# EAGLE board PFOP_panelized (EAGLE 9.1.3)
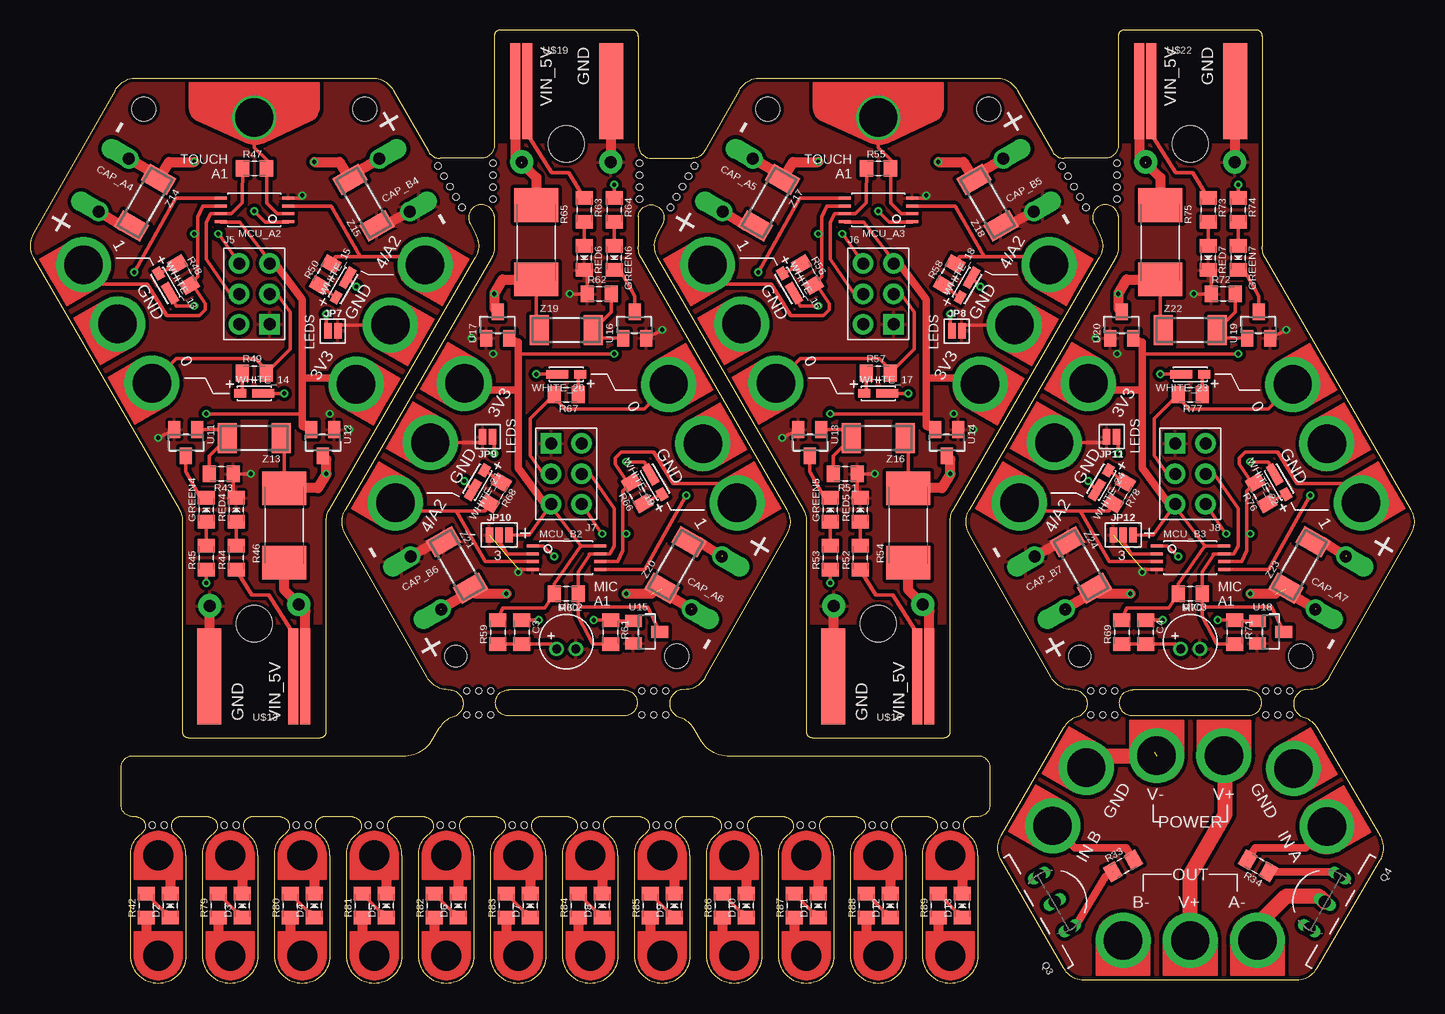
[diagram p0: board, top side]
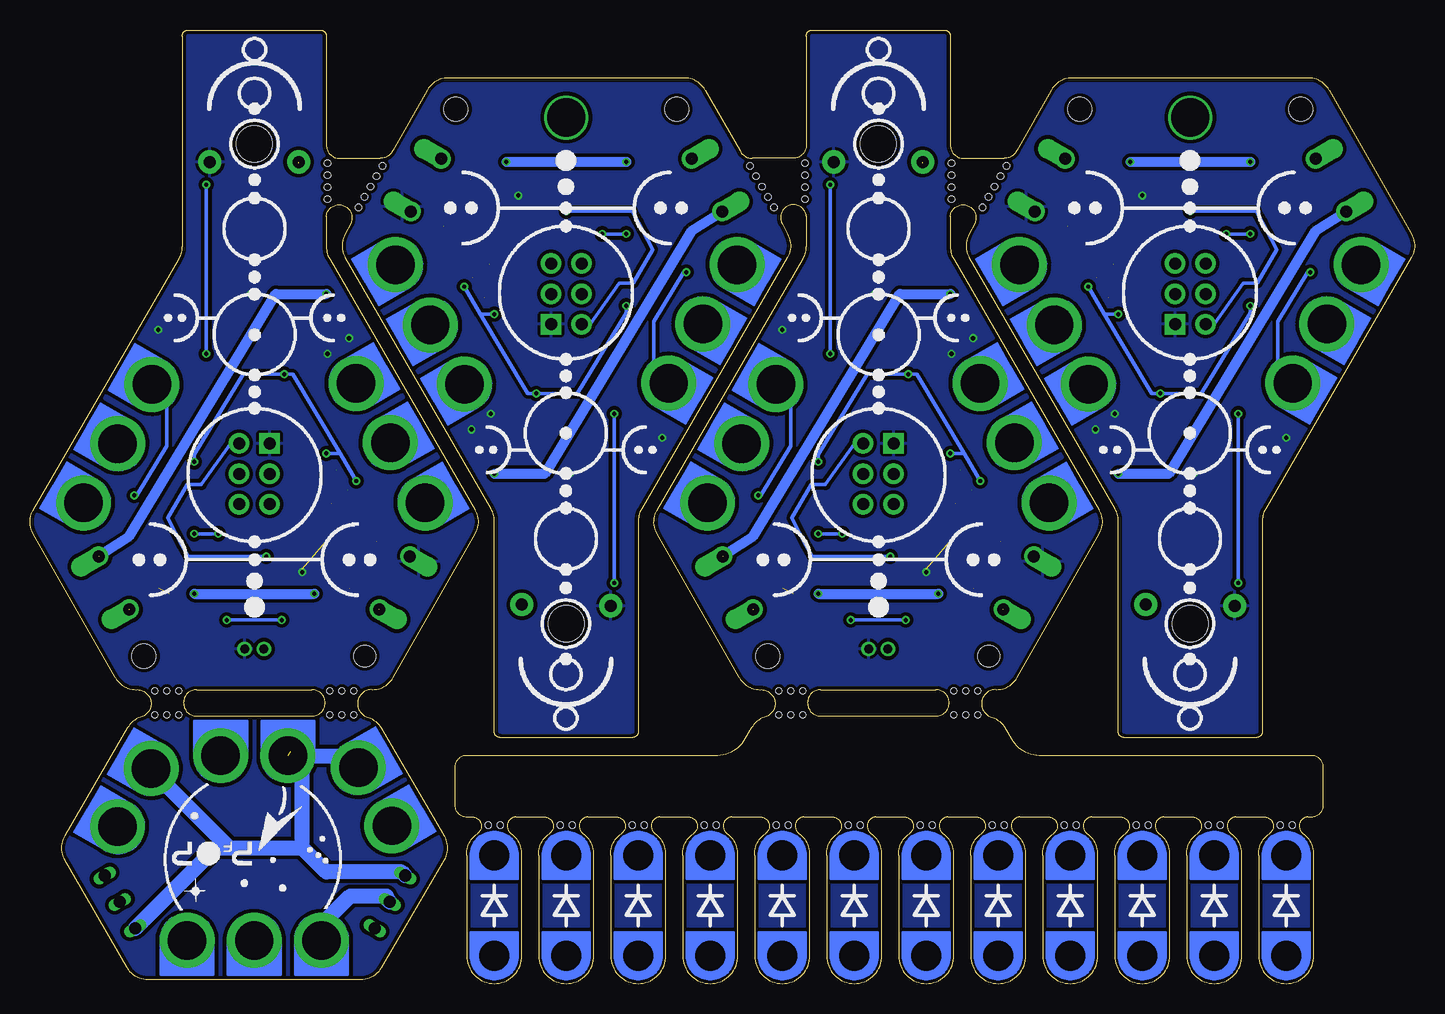
[diagram p1: board, bottom side, seen from below]

Size 115.38 x 79.5 mm. Coordinates in mm from the lower left corner, seen from the top.
Outline: 56.27,25.51 63.12,37.5 arc60 63.11,39.5 50.96,60.43 arc-30 50.69,61.44 50.69,64 arc-200 52.71,63.36 52.26,62.5 arc60 52.27,60.5 64.42,39.57 arc-30 64.69,38.56 64.69,21 arc90 65.19,20.5 76.19,20.5 arc90 76.69,21 76.69,38.56 arc-30 76.96,39.57 89.11,60.5 arc60 89.12,62.5 88.67,63.36 arc-200 90.69,64 90.69,61.44 arc-30 90.42,60.43 78.27,39.5 arc60 78.26,37.5 85.11,25.51 arc60 86.85,24.5 arc-170 87.19,22.2 arc40 86.11,21.31 80.88,12.31 arc60 80.88,10.29 86.11,1.29 arc60 87.84,0.3 105.54,0.3 arc60 107.27,1.29 112.51,10.29 arc60 112.51,12.31 107.27,21.31 arc40 106.19,22.2 arc-170 106.53,24.5 arc60 108.27,25.51 115.12,37.5 arc60 115.11,39.5 102.96,60.43 arc-30 102.69,61.44 102.69,79 arc90 102.19,79.5 91.19,79.5 arc90 90.69,79 90.69,69.9 arc-90 89.59,68.8 86.19,68.8 arc-65 85.17,69.42 82.27,74.49 arc60 80.53,75.5 60.85,75.5 arc60 59.11,74.49 56.21,69.42 arc-65 55.19,68.8 51.79,68.8 arc-90 50.69,69.9 50.69,79 arc90 50.19,79.5 39.19,79.5 arc90 38.69,79 38.69,69.9 arc-90 37.59,68.8 34.19,68.8 arc-65 33.17,69.42 30.27,74.49 arc60 28.53,75.5 8.85,75.5 arc60 7.11,74.49 0.26,62.5 arc60 0.27,60.5 12.42,39.57 arc-30 12.69,38.56 12.69,21 arc90 13.19,20.5 24.19,20.5 arc90 24.69,21 24.69,38.56 arc-30 24.96,39.57 37.11,60.5 arc60 37.12,62.5 36.67,63.36 arc-200 38.69,64 38.69,61.44 arc-30 38.42,60.43 26.27,39.5 arc60 26.26,37.5 33.11,25.51 arc60 34.85,24.5 arc-170 35.19,22.2 arc40 34.11,21.31 33.42,20.19 arc-58 31.29,19 8.59,19 arc90 7.59,18 7.59,14.9 arc90 8.59,13.9 8.89,13.9 arc-140 9.29,12.5 arc60 8.39,10.7 8.39,2.3 arc90 10.69,0 arc90 12.99,2.3 12.99,10.7 arc60 12.09,12.5 arc-140 12.49,13.9 14.89,13.9 arc-140 15.29,12.5 arc60 14.39,10.7 14.39,2.3 arc90 16.69,0 arc90 18.99,2.3 18.99,10.7 arc60 18.09,12.5 arc-140 18.49,13.9 20.89,13.9 arc-140 21.29,12.5 arc60 20.39,10.7 20.39,2.3 arc90 22.69,0 arc90 24.99,2.3 24.99,10.7 arc60 24.09,12.5 arc-140 24.49,13.9 26.89,13.9 arc-140 27.29,12.5 arc60 26.39,10.7 26.39,2.3 arc90 28.69,0 arc90 30.99,2.3 30.99,10.7 arc60 30.09,12.5 arc-140 30.49,13.9 32.89,13.9 arc-140 33.29,12.5 arc60 32.39,10.7 32.39,2.3 arc90 34.69,0 arc90 36.99,2.3 36.99,10.7 arc60 36.09,12.5 arc-140 36.49,13.9 38.89,13.9 arc-140 39.29,12.5 arc60 38.39,10.7 38.39,2.3 arc90 40.69,0 arc90 42.99,2.3 42.99,10.7 arc60 42.09,12.5 arc-140 42.49,13.9 44.89,13.9 arc-140 45.29,12.5 arc60 44.39,10.7 44.39,2.3 arc90 46.69,0 arc90 48.99,2.3 48.99,10.7 arc60 48.09,12.5 arc-140 48.49,13.9 50.89,13.9 arc-140 51.29,12.5 arc60 50.39,10.7 50.39,2.3 arc90 52.69,0 arc90 54.99,2.3 54.99,10.7 arc60 54.09,12.5 arc-140 54.49,13.9 56.89,13.9 arc-140 57.29,12.5 arc60 56.39,10.7 56.39,2.3 arc90 58.69,0 arc90 60.99,2.3 60.99,10.7 arc60 60.09,12.5 arc-140 60.49,13.9 62.89,13.9 arc-140 63.29,12.5 arc60 62.39,10.7 62.39,2.3 arc90 64.69,0 arc90 66.99,2.3 66.99,10.7 arc60 66.09,12.5 arc-140 66.49,13.9 68.89,13.9 arc-140 69.29,12.5 arc60 68.39,10.7 68.39,2.3 arc90 70.69,0 arc90 72.99,2.3 72.99,10.7 arc60 72.09,12.5 arc-140 72.49,13.9 74.89,13.9 arc-140 75.29,12.5 arc60 74.39,10.7 74.39,2.3 arc90 76.69,0 arc90 78.99,2.3 78.99,10.7 arc60 78.09,12.5 arc-140 78.49,13.9 78.99,13.9 arc90 79.99,14.9 79.99,18 arc90 78.99,19 58.09,19 arc-58 55.96,20.19 55.27,21.31 arc40 54.19,22.2 arc-170 54.53,24.5 arc60 56.27,25.51
Outline: 91.89,22.3 arc-180 91.89,24.5 101.49,24.5 arc-180 101.49,22.3 91.89,22.3
Outline: 39.89,22.3 arc-180 39.89,24.5 49.49,24.5 arc-180 49.49,22.3 39.89,22.3
Copper layers (1*16): Top 0.035mm / dielectric 1.6mm / Bottom 0.035mm
Design rules "Elecrow_2-layer_PCB_eagle_rule *": minimum track width 6mil, minimum drill 12mil, track to track 6mil, track to pad 6mil, pad to pad 6mil, via to via 8mil, smd to smd 0mil, copper to edge 0.3mm, drill to drill 10mil, minimum pad ring 0mil, minimum via ring 6mil, stop-mask expansion 0mil, vias tented up to drill 100mil, thermal gap 10mil
Holes 0.5 mm at 34.01,68.17 34.51,67.31 35.01,66.44 35.51,65.58 36.01,64.71 38.59,65.4 38.59,66.4 38.59,67.4 38.59,68.4 55.37,68.17 54.87,67.31 54.37,66.44 53.87,65.58 53.37,64.71 50.79,65.4 50.79,66.4 50.79,67.4 50.79,68.4 86.01,68.17 86.51,67.31 87.01,66.44 87.51,65.58 88.01,64.71 90.59,65.4 90.59,66.4 90.59,67.4 90.59,68.4 90.39,22.4 89.39,22.4 88.39,22.4 90.39,24.4 89.39,24.4 88.39,24.4 104.99,22.4 103.99,22.4 102.99,22.4 104.99,24.4 103.99,24.4 102.99,24.4 76.19,13.2 77.19,13.2 70.19,13.2 71.19,13.2 64.19,13.2 65.19,13.2 58.19,13.2 59.19,13.2 52.19,13.2 53.19,13.2 46.19,13.2 47.19,13.2 40.19,13.2 41.19,13.2 34.19,13.2 35.19,13.2 28.19,13.2 29.19,13.2 22.19,13.2 23.19,13.2 16.19,13.2 17.19,13.2 10.19,13.2 11.19,13.2 38.39,22.4 37.39,22.4 36.39,22.4 38.39,24.4 37.39,24.4 36.39,24.4 52.99,22.4 51.99,22.4 50.99,22.4 52.99,24.4 51.99,24.4 50.99,24.4
Holes 3 mm at 18.69,30 70.69,30 44.69,70 96.69,70
Holes 2 mm at 9.49,72.9 27.89,72.9 61.49,72.9 79.89,72.9 53.89,27.3 105.89,27.3
Holes 1.8 mm at 35.49,27.3 87.49,27.3

## Footprints (pad centres in the part's own frame; a part is rotated, then mirrored left to right if it is on the bottom)
0805 = smd 1.1 x 1.4: 1 -1,0; 2 1,0
SUPERCAP_2.7V-4.7F = drill 1 pad 1.676 offset: + 2.54,3.81; - -2.54,3.81
0805_LED = smd 1.1 x 1.4: + -1,0; - 1,0
ISP_HEADER = drill 1 pad 1.676 square: GND 1.27,-2.54 | drill 1 pad 1.676: MISO -1.27,2.54; MOSI 1.27,0; RESET -1.27,-2.54; SCK -1.27,0; VCC 1.27,2.54
SMT-JUMPER_2_NO_NO-SILK = smd 0.635 x 1.27: 1 -0.406,0; 2 0.406,0
SMT-JUMPER_3_NO_NO-SILK = smd 0.635 x 1.27: 1 -0.813,0; 2 0,0; 3 0.813,0
TSSOP-8 = smd 1 x 0.25: 1 -2.813,0.975; 2 -2.813,0.325; 3 -2.813,-0.325; 4 -2.813,-0.975; 5 2.813,-0.975; 6 2.813,-0.325; 7 2.813,0.325; 8 2.813,0.975
ELECTRET_4.5MM = drill 0.75 pad 1.2: + 0.8,0.6; - -0.8,0.6
POWER_TRANSISTOR = drill 1.016 long: B -2.54,0; C 0,0; E 2.54,0
2512 = smd 2.8 x 3.7: 1 -3.1,0; 2 3.1,0
BIGTAP = drill 3.2 pad 4.572: P$1 0,0
SEQUIN_TERMINAL = drill 2.5: P$1 0,0
BIGTAP_TOUCH = drill 3.2 pad 3.683: P$1 0,0
SOT23 = smd 1.4 x 1: 1 -1.1,0.95; 2 -1.1,-0.95; 3 1.1,0
USB_CONN_POWER = smd 0.8 x 8: 5V_A -4.25,-0.1; 5V_B -3.25,-0.1 | smd 2 x 8: GND 3.75,-0.1
1PIN = drill 1 pad 1.93: P$1 0,0
PLCC-2_LED = smd 1 x 0.7: + -1.15,0 | smd 1.8 x 0.7: - 0.75,0
MINIMELF = smd 1.6 x 2.5: 1 -2.25,0; 2 2.25,0

## Placement (x,y rotation side)
C3  0.1uF  [0805]  40.99,29.3 270 top
C4  0.1uF  [0805]  92.99,29.3 270 top
CAP_A4  4.7F  [SUPERCAP_2.7V-4.7F]  3.68,68.46 240 top
CAP_A5  4.7F  [SUPERCAP_2.7V-4.7F]  55.68,68.46 240 top
CAP_A6  4.7F  [SUPERCAP_2.7V-4.7F]  59.69,31.5 60 top
CAP_A7  4.7F  [SUPERCAP_2.7V-4.7F]  111.69,31.5 60 top
CAP_B4  4.7F  [SUPERCAP_2.7V-4.7F]  33.68,68.46 120 top
CAP_B5  4.7F  [SUPERCAP_2.7V-4.7F]  85.68,68.46 120 top
CAP_B6  4.7F  [SUPERCAP_2.7V-4.7F]  29.69,31.5 300 top
CAP_B7  4.7F  [SUPERCAP_2.7V-4.7F]  81.69,31.5 300 top
D2  LED0805  [0805_LED]  11.69,6.5 90 top
D3  LED0805  [0805_LED]  17.69,6.5 90 top
D4  LED0805  [0805_LED]  23.69,6.5 90 top
D5  LED0805  [0805_LED]  29.69,6.5 90 top
D6  LED0805  [0805_LED]  35.69,6.5 90 top
D7  LED0805  [0805_LED]  41.69,6.5 90 top
D8  LED0805  [0805_LED]  47.69,6.5 90 top
D9  LED0805  [0805_LED]  53.69,6.5 90 top
D10  LED0805  [0805_LED]  59.69,6.5 90 top
D11  LED0805  [0805_LED]  65.69,6.5 90 top
D12  LED0805  [0805_LED]  71.69,6.5 90 top
D13  LED0805  [0805_LED]  77.69,6.5 90 top
GREEN4  LED  [0805_LED]  14.69,39.5 90 top
GREEN5  LED  [0805_LED]  66.69,39.5 90 top
GREEN6  LED  [0805_LED]  48.69,60.5 270 top
GREEN7  LED  [0805_LED]  100.69,60.5 270 top
J5  ISP_HEADER  [ISP_HEADER]  18.69,57.5 0 top
J6  ISP_HEADER  [ISP_HEADER]  70.69,57.5 0 top
J7  ISP_HEADER  [ISP_HEADER]  44.69,42.5 180 top
J8  ISP_HEADER  [ISP_HEADER]  96.69,42.5 180 top
JP7  JUMPER  [SMT-JUMPER_2_NO_NO-SILK]  25.25,54.42 0 top
JP8  JUMPER  [SMT-JUMPER_2_NO_NO-SILK]  77.25,54.42 0 top
JP9  JUMPER  [SMT-JUMPER_2_NO_NO-SILK]  38.13,45.58 180 top
JP10  JUMPER  [SMT-JUMPER_3_NO_NO-SILK]  39.09,37.4 0 top
JP11  JUMPER  [SMT-JUMPER_2_NO_NO-SILK]  90.13,45.58 180 top
JP12  JUMPER  [SMT-JUMPER_3_NO_NO-SILK]  91.09,37.4 0 top
MCU_A2  ATTINY45  [TSSOP-8]  18.69,64.5 180 top
MCU_A3  ATTINY45  [TSSOP-8]  70.69,64.5 180 top
MCU_B2  ATTINY45  [TSSOP-8]  44.69,35.5 0 top
MCU_B3  ATTINY45  [TSSOP-8]  96.69,35.5 0 top
MIC2  ELECTRET  [ELECTRET_4.5MM]  44.69,28.5 180 top
MIC3  ELECTRET  [ELECTRET_4.5MM]  96.69,28.5 180 top
Q3  [POWER_TRANSISTOR]  85.39,6.8 120 top
Q4  [POWER_TRANSISTOR]  107.89,6.8 240 top
R33  2.2k  [0805]  91.09,9.8 30 top
R34  2.2k  [0805]  102.34,9.81 150 top
R42  [0805]  9.69,6.5 90 top
R43  10k  [0805]  15.94,42.5 180 top
R44  100R  [0805]  17.19,35.5 90 top
R45  100R  [0805]  14.69,35.5 90 top
R46  5.6R  [2512]  21.19,38.2 90 top
R47  2.2M  [0805]  18.71,67.96 0 top
R48  100R  [0805]  12.79,59.1 300 top
R49  100R  [0805]  18.69,50.9 0 top
R50  100R  [0805]  24.59,59.1 60 top
R51  10k  [0805]  67.94,42.5 180 top
R52  100R  [0805]  69.19,35.5 90 top
R53  100R  [0805]  66.69,35.5 90 top
R54  5.6R  [2512]  73.19,38.2 90 top
R55  2.2M  [0805]  70.71,67.96 0 top
R56  100R  [0805]  64.79,59.1 300 top
R57  100R  [0805]  70.69,50.9 0 top
R58  100R  [0805]  76.59,59.1 60 top
R59  10k  [0805]  38.99,29.3 90 top
R60  10k  [0805]  44.69,32.5 180 top
R61  100k  [0805]  48.39,29.3 270 top
R62  10k  [0805]  47.44,57.5 0 top
R63  100R  [0805]  46.19,64.5 270 top
R64  100R  [0805]  48.69,64.5 270 top
R65  5.6R  [2512]  42.19,61.8 270 top
R66  100R  [0805]  50.59,40.9 120 top
R67  100R  [0805]  44.69,49.1 180 top
R68  100R  [0805]  38.79,40.9 240 top
R69  10k  [0805]  90.99,29.3 90 top
R70  10k  [0805]  96.69,32.5 180 top
R71  100k  [0805]  100.39,29.3 270 top
R72  10k  [0805]  99.44,57.5 0 top
R73  100R  [0805]  98.19,64.5 270 top
R74  100R  [0805]  100.69,64.5 270 top
R75  5.6R  [2512]  94.19,61.8 270 top
R76  100R  [0805]  102.59,40.9 120 top
R77  100R  [0805]  96.69,49.1 180 top
R78  100R  [0805]  90.79,40.9 240 top
R79  [0805]  15.69,6.5 90 top
R80  [0805]  21.69,6.5 90 top
R81  [0805]  27.69,6.5 90 top
R82  [0805]  33.69,6.5 90 top
R83  [0805]  39.69,6.5 90 top
R84  [0805]  45.69,6.5 90 top
R85  [0805]  51.69,6.5 90 top
R86  [0805]  57.69,6.5 90 top
R87  [0805]  63.69,6.5 90 top
R88  [0805]  69.69,6.5 90 top
R89  [0805]  75.69,6.5 90 top
RED4  LED  [0805_LED]  17.19,39.5 90 top
RED5  LED  [0805_LED]  69.19,39.5 90 top
RED6  LED  [0805_LED]  46.19,60.5 270 top
RED7  LED  [0805_LED]  98.19,60.5 270 top
TP32  SEWTAPBIG  [BIGTAP]  102.29,3.6 180 top
TP33  SEWTAPBIG  [BIGTAP]  91.09,3.6 180 top
TP34  SEWTAPBIG  [BIGTAP]  85.22,13.15 60 top
TP35  SEWTAPBIG  [BIGTAP]  108.09,13.08 300 top
TP36  SEWTAPBIG  [BIGTAP]  96.69,3.6 180 top
TP37  SEWTAPBIG  [BIGTAP]  99.49,19 0 top
TP38  SEWTAPBIG  [BIGTAP]  88.02,18 60 top
TP39  SEWTAPBIG  [BIGTAP]  105.29,17.93 300 top
TP40  SEWTAPBIG  [BIGTAP]  93.89,19 0 top
TP47  SEWTAPSEQUIN  [SEQUIN_TERMINAL]  10.69,10.7 270 top
TP48  SEWTAPSEQUIN  [SEQUIN_TERMINAL]  10.69,2.3 90 top
TP49  SEWTAPBIG  [BIGTAP]  4.45,59.93 120 top
TP50  SEWTAPBIG  [BIGTAP]  10.15,50.06 120 top
TP51  SEWTAPBIG  [BIGTAP]  32.93,59.93 240 top
TP52  SEWTAPBIG  [BIGTAP]  30.03,54.91 240 top
TP53  SEWTAPBIG  [BIGTAP]  7.3,54.99 120 top
TP54  SEWTAPBIG  [BIGTAP]  27.18,49.97 240 top
TP55  SEWTAP  [BIGTAP_TOUCH]  18.69,72.2 0 top
TP56  SEWTAPBIG  [BIGTAP]  56.45,59.93 120 top
TP57  SEWTAPBIG  [BIGTAP]  62.15,50.06 120 top
TP58  SEWTAPBIG  [BIGTAP]  84.93,59.93 240 top
TP59  SEWTAPBIG  [BIGTAP]  82.03,54.91 240 top
TP60  SEWTAPBIG  [BIGTAP]  59.3,54.99 120 top
TP61  SEWTAPBIG  [BIGTAP]  79.18,49.97 240 top
TP62  SEWTAP  [BIGTAP_TOUCH]  70.69,72.2 0 top
TP63  SEWTAPBIG  [BIGTAP]  58.93,40.07 300 top
TP64  SEWTAPBIG  [BIGTAP]  53.23,49.94 300 top
TP65  SEWTAPBIG  [BIGTAP]  30.45,40.07 60 top
TP66  SEWTAPBIG  [BIGTAP]  33.35,45.09 60 top
TP67  SEWTAPBIG  [BIGTAP]  56.08,45.01 300 top
TP68  SEWTAPBIG  [BIGTAP]  36.2,50.03 60 top
TP69  SEWTAPBIG  [BIGTAP]  110.93,40.07 300 top
TP70  SEWTAPBIG  [BIGTAP]  105.23,49.94 300 top
TP71  SEWTAPBIG  [BIGTAP]  82.45,40.07 60 top
TP72  SEWTAPBIG  [BIGTAP]  85.35,45.09 60 top
TP73  SEWTAPBIG  [BIGTAP]  108.08,45.01 300 top
TP74  SEWTAPBIG  [BIGTAP]  88.2,50.03 60 top
TP75  SEWTAPSEQUIN  [SEQUIN_TERMINAL]  16.69,10.7 270 top
TP76  SEWTAPSEQUIN  [SEQUIN_TERMINAL]  16.69,2.3 90 top
TP77  SEWTAPSEQUIN  [SEQUIN_TERMINAL]  22.69,10.7 270 top
TP78  SEWTAPSEQUIN  [SEQUIN_TERMINAL]  22.69,2.3 90 top
TP79  SEWTAPSEQUIN  [SEQUIN_TERMINAL]  28.69,10.7 270 top
TP80  SEWTAPSEQUIN  [SEQUIN_TERMINAL]  28.69,2.3 90 top
TP81  SEWTAPSEQUIN  [SEQUIN_TERMINAL]  34.69,10.7 270 top
TP82  SEWTAPSEQUIN  [SEQUIN_TERMINAL]  34.69,2.3 90 top
TP83  SEWTAPSEQUIN  [SEQUIN_TERMINAL]  40.69,10.7 270 top
TP84  SEWTAPSEQUIN  [SEQUIN_TERMINAL]  40.69,2.3 90 top
TP85  SEWTAPSEQUIN  [SEQUIN_TERMINAL]  46.69,10.7 270 top
TP86  SEWTAPSEQUIN  [SEQUIN_TERMINAL]  46.69,2.3 90 top
TP87  SEWTAPSEQUIN  [SEQUIN_TERMINAL]  52.69,10.7 270 top
TP88  SEWTAPSEQUIN  [SEQUIN_TERMINAL]  52.69,2.3 90 top
TP89  SEWTAPSEQUIN  [SEQUIN_TERMINAL]  58.69,10.7 270 top
TP90  SEWTAPSEQUIN  [SEQUIN_TERMINAL]  58.69,2.3 90 top
TP91  SEWTAPSEQUIN  [SEQUIN_TERMINAL]  64.69,10.7 270 top
TP92  SEWTAPSEQUIN  [SEQUIN_TERMINAL]  64.69,2.3 90 top
TP93  SEWTAPSEQUIN  [SEQUIN_TERMINAL]  70.69,10.7 270 top
TP94  SEWTAPSEQUIN  [SEQUIN_TERMINAL]  70.69,2.3 90 top
TP95  SEWTAPSEQUIN  [SEQUIN_TERMINAL]  76.69,10.7 270 top
TP96  SEWTAPSEQUIN  [SEQUIN_TERMINAL]  76.69,2.3 90 top
U11  2N7002  [SOT23]  12.99,45.1 270 top
U12  3.3V  [SOT23]  24.39,45.1 270 top
U13  2N7002  [SOT23]  64.99,45.1 270 top
U14  3.3V  [SOT23]  76.39,45.1 270 top
U15  BC847  [SOT23]  51.39,29.3 0 top
U16  2N7002  [SOT23]  50.39,54.9 90 top
U17  3.3V  [SOT23]  38.99,54.9 90 top
U18  BC847  [SOT23]  103.39,29.3 0 top
U19  2N7002  [SOT23]  102.39,54.9 90 top
U20  3.3V  [SOT23]  90.99,54.9 90 top
U$13  USB_CONN_POWER  [USB_CONN_POWER]  18.69,25.5 180 top
U$14  1PIN  [1PIN]  22.39,31.6 0 top
U$15  1PIN  [1PIN]  14.99,31.5 0 top
U$16  USB_CONN_POWER  [USB_CONN_POWER]  70.69,25.5 180 top
U$17  1PIN  [1PIN]  74.39,31.6 0 top
U$18  1PIN  [1PIN]  66.99,31.5 0 top
U$19  USB_CONN_POWER  [USB_CONN_POWER]  44.69,74.5 0 top
U$20  1PIN  [1PIN]  40.99,68.5 180 top
U$21  1PIN  [1PIN]  48.39,68.5 180 top
U$22  USB_CONN_POWER  [USB_CONN_POWER]  96.69,74.5 0 top
U$23  1PIN  [1PIN]  92.99,68.5 180 top
U$24  1PIN  [1PIN]  100.39,68.5 180 top
WHITE_13  LED  [PLCC-2_LED]  11.29,58.2 300 top
WHITE_14  LED  [PLCC-2_LED]  18.69,49.2 0 top
WHITE_15  LED  [PLCC-2_LED]  26.09,58.2 60 top
WHITE_16  LED  [PLCC-2_LED]  63.29,58.2 300 top
WHITE_17  LED  [PLCC-2_LED]  70.69,49.2 0 top
WHITE_18  LED  [PLCC-2_LED]  78.09,58.2 60 top
WHITE_19  LED  [PLCC-2_LED]  52.09,41.8 120 top
WHITE_20  LED  [PLCC-2_LED]  44.69,50.8 180 top
WHITE_21  LED  [PLCC-2_LED]  37.29,41.8 240 top
WHITE_22  LED  [PLCC-2_LED]  104.09,41.8 120 top
WHITE_23  LED  [PLCC-2_LED]  96.69,50.8 180 top
WHITE_24  LED  [PLCC-2_LED]  89.29,41.8 240 top
Z13  5.1V  [MINIMELF]  18.69,45.5 180 top
Z14  2.7V  [MINIMELF]  9.59,65.1 240 top
Z15  2.7V  [MINIMELF]  27.79,65.1 120 top
Z16  5.1V  [MINIMELF]  70.69,45.5 180 top
Z17  2.7V  [MINIMELF]  61.59,65.1 240 top
Z18  2.7V  [MINIMELF]  79.79,65.1 120 top
Z19  5.1V  [MINIMELF]  44.69,54.5 0 top
Z20  2.7V  [MINIMELF]  53.79,34.9 60 top
Z21  2.7V  [MINIMELF]  35.59,34.9 300 top
Z22  5.1V  [MINIMELF]  96.69,54.5 0 top
Z23  2.7V  [MINIMELF]  105.79,34.9 60 top
Z24  2.7V  [MINIMELF]  87.59,34.9 300 top

## Library data of the parts
C3 C4 CAP_A4-CAP_A7 CAP_B4-CAP_B7 D2-D13 GREEN4-GREEN7 J5-J8 JP7-JP12 MCU_A2 MCU_A3 MCU_B2 MCU_B3 MIC2 MIC3 Q3 Q4 R33 R34 R42-R89 RED4-RED7 TP32-TP40 TP47-TP96 U11-U20 U$13-U$24 WHITE_13-WHITE_24 Z13-Z24 = PFOP

## Nets
A_10: J5.SCK MCU_A2.7 R47.1
A_11: MCU_A2.2 R47.2 TP55.P$1
A_12: MCU_A2.3 R50.2 TP51.P$1
A_13: J5.MOSI MCU_A2.5 R49.2 TP50.P$1
A_14: J5.MISO MCU_A2.6 R48.2 TP49.P$1
A_15: J6.SCK MCU_A3.7 R55.1
A_16: MCU_A3.2 R55.2 TP62.P$1
A_17: MCU_A3.3 R58.2 TP58.P$1
A_18: J6.MOSI MCU_A3.5 R57.2 TP57.P$1
A_19: J6.MISO MCU_A3.6 R56.2 TP56.P$1
A_GND1: Q4.C TP32.P$1
A_IN1: R34.2 TP35.P$1
A_RESET2: J5.RESET MCU_A2.1
A_RESET3: J6.RESET MCU_A3.1
B_10: J7.SCK MCU_B2.7 R60.1 R61.2 U15.3
B_11: J7.MOSI MCU_B2.5 R67.2 TP64.P$1
B_12: J7.MISO MCU_B2.6 R66.2 TP63.P$1
B_13: MCU_B2.3 R68.2 TP65.P$1
B_14: JP10.2 MCU_B2.2
B_15: J8.SCK MCU_B3.7 R70.1 R71.2 U18.3
B_16: J8.MOSI MCU_B3.5 R77.2 TP70.P$1
B_17: J8.MISO MCU_B3.6 R76.2 TP69.P$1
B_18: MCU_B3.3 R78.2 TP71.P$1
B_19: JP12.2 MCU_B3.2
B_GND1: Q3.C TP33.P$1
B_IN1: R33.2 TP34.P$1
B_RESET2: J7.RESET MCU_B2.1
B_RESET3: J8.RESET MCU_B3.1
CHARGE_LED2: R44.1 U$13.5V_B
CHARGE_LED3: R52.1 U$16.5V_B
CHARGE_LED4: R63.1 U$19.5V_B
CHARGE_LED5: R73.1 U$22.5V_B
GND2: CAP_B4.- J5.GND JP7.2 MCU_A2.4 R43.1 RED4.- TP52.P$1 TP53.P$1 U11.2 U12.1 U$13.GND U$15.P$1 Z15.1
GND3: CAP_B5.- J6.GND JP8.2 MCU_A3.4 R51.1 RED5.- TP59.P$1 TP60.P$1 U13.2 U14.1 U$16.GND U$18.P$1 Z18.1
GND4: CAP_B6.- J7.GND JP9.2 JP10.1 MCU_B2.4 MIC2.- R62.1 RED6.- TP66.P$1 TP67.P$1 U15.2 U16.2 U17.1 U$19.GND U$21.P$1 Z21.1
GND5: CAP_B7.- J8.GND JP11.2 JP12.1 MCU_B3.4 MIC3.- R72.1 RED7.- TP72.P$1 TP73.P$1 U18.2 U19.2 U20.1 U$22.GND U$24.P$1 Z24.1
N$37: Q3.B R33.1
N$38: Q4.B R34.1
N$48: R42.1 TP48.P$1
N$49: D2.+ R42.2
N$50: D2.- TP47.P$1
N$51: R44.2 RED4.+
N$52: R43.2 U11.1 Z13.2
N$53: GREEN4.- U11.3
N$54: CAP_A4.- CAP_B4.+ Z14.1 Z15.2
N$55: GREEN4.+ R45.2
N$56: R48.1 WHITE_13.+
N$57: R49.1 WHITE_14.+
N$58: R50.1 WHITE_15.+
N$59: JP7.1 WHITE_13.- WHITE_14.- WHITE_15.-
N$60: R52.2 RED5.+
N$61: R51.2 U13.1 Z16.2
N$62: GREEN5.- U13.3
N$63: CAP_A5.- CAP_B5.+ Z17.1 Z18.2
N$64: GREEN5.+ R53.2
N$65: R56.1 WHITE_16.+
N$66: R57.1 WHITE_17.+
N$67: R58.1 WHITE_18.+
N$68: JP8.1 WHITE_16.- WHITE_17.- WHITE_18.-
N$69: C3.2 MIC2.+ R59.1
N$70: C3.1 R61.1 U15.1
N$71: R63.2 RED6.+
N$72: R62.2 U16.1 Z19.2
N$73: GREEN6.- U16.3
N$74: CAP_A6.- CAP_B6.+ Z20.1 Z21.2
N$75: GREEN6.+ R64.2
N$76: R66.1 WHITE_19.+
N$77: R67.1 WHITE_20.+
N$78: R68.1 WHITE_21.+
N$79: JP9.1 WHITE_19.- WHITE_20.- WHITE_21.-
N$80: C4.2 MIC3.+ R69.1
N$81: C4.1 R71.1 U18.1
N$82: R73.2 RED7.+
N$83: R72.2 U19.1 Z22.2
N$84: GREEN7.- U19.3
N$85: CAP_A7.- CAP_B7.+ Z23.1 Z24.2
N$86: GREEN7.+ R74.2
N$87: R76.1 WHITE_22.+
N$88: R77.1 WHITE_23.+
N$89: R78.1 WHITE_24.+
N$90: JP11.1 WHITE_22.- WHITE_23.- WHITE_24.-
N$91: R79.1 TP76.P$1
N$92: D3.+ R79.2
N$93: D3.- TP75.P$1
N$94: R80.1 TP78.P$1
N$95: D4.+ R80.2
N$96: D4.- TP77.P$1
N$97: R81.1 TP80.P$1
N$98: D5.+ R81.2
N$99: D5.- TP79.P$1
N$100: R82.1 TP82.P$1
N$101: D6.+ R82.2
N$102: D6.- TP81.P$1
N$103: R83.1 TP84.P$1
N$104: D7.+ R83.2
N$105: D7.- TP83.P$1
N$106: R84.1 TP86.P$1
N$107: D8.+ R84.2
N$108: D8.- TP85.P$1
N$109: R85.1 TP88.P$1
N$110: D9.+ R85.2
N$111: D9.- TP87.P$1
N$112: R86.1 TP90.P$1
N$113: D10.+ R86.2
N$114: D10.- TP89.P$1
N$115: R87.1 TP92.P$1
N$116: D11.+ R87.2
N$117: D11.- TP91.P$1
N$118: R88.1 TP94.P$1
N$119: D12.+ R88.2
N$120: D12.- TP93.P$1
N$121: R89.1 TP96.P$1
N$122: D13.+ R89.2
N$123: D13.- TP95.P$1
S$8: Q3.E Q4.E TP38.P$1 TP39.P$1 TP40.P$1
V_POWER1: TP36.P$1 TP37.P$1
VCAP4: CAP_A4.+ R46.2 U12.3 Z13.1 Z14.2
VCAP5: CAP_A5.+ R54.2 U14.3 Z16.1 Z17.2
VCAP6: CAP_A6.+ R65.2 U17.3 Z19.1 Z20.2
VCAP7: CAP_A7.+ R75.2 U20.3 Z22.1 Z23.2
VCC2: J5.VCC MCU_A2.8 R45.1 TP54.P$1 U12.2
VCC3: J6.VCC MCU_A3.8 R53.1 TP61.P$1 U14.2
VCC4: J7.VCC JP10.3 MCU_B2.8 R59.2 R60.2 R64.1 TP68.P$1 U17.2
VCC5: J8.VCC JP12.3 MCU_B3.8 R69.2 R70.2 R74.1 TP74.P$1 U20.2
VCHARGE2: R46.1 U$13.5V_A U$14.P$1
VCHARGE3: R54.1 U$16.5V_A U$17.P$1
VCHARGE4: R65.1 U$19.5V_A U$20.P$1
VCHARGE5: R75.1 U$22.5V_A U$23.P$1

## Tracks (layer width: path | path; a pad name or v marks a point on that pad's centre or on a via)
A_10
  Top 0.305: R47.1 17.69,65.5 17.69,65.1 16.77,64.17 MCU_A2.7 15.07,64.17 14.69,63.5 14.69,60.4 16.69,57.5 J5.SCK
A_11
  Top 0.305: MCU_A2.2 20.62,64.17 19.71,65.08 R47.2 19.71,68.68 18.69,69.7 TP55.P$1
A_12  (1 unrouted)
  Top 0.305: 31.09,60.8 TP51.P$1 32.29,60.6 27.54,60.61 | 27.54,60.61 25.09,64.8 MCU_A2.3 | R50.2 25.49,60.6 27.54,60.61
A_13  (via drill 0.35)
  Top 0.305: MCU_A2.5 12.17,65.47 8.78,59.45 v8.69,59.3 | 11.39,51.29 arc-90 TP50.P$1 | TP50.P$1 11,50.9 | J5.MOSI 20.59,57.5 21.69,55.97 21.69,52.9 20.49,51.7 R49.2 19.69,51.2 18.79,52.1 12.2,52.1 TP50.P$1
  Bottom 0.305: v8.69,59.3 8.89,59.3 11.39,55.2 11.39,50.8 TP50.P$1
A_14  (via drill 0.35)  (1 unrouted)
  Top 0.305: MCU_A2.6 14.42,64.83 13.99,63.9 13.99,62.5 | 13.99,62.5 13.99,58.93 R48.2 13.59,58.2 14.59,56.7 14.59,56.2 14.09,55.7 11.39,55.7 9.79,58.3 8.29,58.3 5.48,58.3 TP49.P$1 | J5.MISO 15.89,62.27 v15.69,62.5 | v13.69,62.5 13.99,62.5
  Bottom 0.305: v15.69,62.5 v13.69,62.5
A_15
  Top 0.305: R55.1 69.69,65.5 69.69,65.1 68.77,64.17 MCU_A3.7 67.07,64.17 66.69,63.5 66.69,60.4 68.69,57.5 J6.SCK
A_16
  Top 0.305: MCU_A3.2 72.62,64.17 71.71,65.08 R55.2 71.71,68.68 70.69,69.7 TP62.P$1
A_17  (1 unrouted)
  Top 0.305: 83.09,60.8 TP58.P$1 84.29,60.6 79.54,60.61 | 79.54,60.61 77.09,64.8 MCU_A3.3 | R58.2 77.49,60.6 79.54,60.61
A_18  (via drill 0.35)
  Top 0.305: MCU_A3.5 64.17,65.47 60.78,59.45 v60.69,59.3 | 63.39,51.29 arc-90 TP57.P$1 | TP57.P$1 63,50.9 | J6.MOSI 72.59,57.5 73.69,55.97 73.69,52.9 72.49,51.7 R57.2 71.69,51.2 70.79,52.1 64.2,52.1 TP57.P$1
  Bottom 0.305: v60.69,59.3 60.89,59.3 63.39,55.2 63.39,50.8 TP57.P$1
A_19  (via drill 0.35)  (1 unrouted)
  Top 0.305: MCU_A3.6 66.42,64.83 65.99,63.9 65.99,62.5 | 65.99,62.5 65.99,58.93 R56.2 65.59,58.2 66.59,56.7 66.59,56.2 66.09,55.7 63.39,55.7 61.79,58.3 60.29,58.3 57.48,58.3 TP56.P$1 | J6.MISO 67.89,62.27 v67.69,62.5 | v65.69,62.5 65.99,62.5
  Bottom 0.305: v67.69,62.5 v65.69,62.5
A_GND1
  Top 1.27: TP32.P$1 102.29,4.9 104.69,7.3 107.39,7.3 Q4.C
  Bottom 1.27: 101.69,4.3 102.29,3.7 TP32.P$1
A_IN1  (1 unrouted)
  Top 0.61: TP35.P$1 106.31,11.3 102.09,11.3 R34.2
A_RESET2  (via drill 0.35)
  Top 0.305: v18.69,64.4 19.59,63.5 21.53,63.5 MCU_A2.1
  Bottom 0.305: v18.69,64.4 13.19,64.4 12.69,63.5 11.49,61.2 13.09,58.4 14.29,58.4 16.69,55 17.38,55 arc-90 J5.RESET
A_RESET3  (via drill 0.35)
  Top 0.305: v70.69,64.4 71.59,63.5 73.53,63.5 MCU_A3.1
  Bottom 0.305: v70.69,64.4 65.19,64.4 64.69,63.5 63.49,61.2 65.09,58.4 66.29,58.4 68.69,55 69.38,55 arc-90 J6.RESET
B_10
  Top 0.305: 46.62,35.83 46.69,35.83 | 46.69,35.83 MCU_B2.7 48.32,35.83 48.69,36.5 48.69,39.6 46.69,42.5 J7.SCK | R61.2 46.89,28.3 45.69,30.62 45.69,31.4 | 45.69,31.4 R60.1 45.69,34.3 46.69,35.83 | U15.3 51.49,31.4 45.69,31.4
B_11  (via drill 0.35)
  Top 0.305: MCU_B2.5 51.22,34.52 54.61,40.55 v54.69,40.7 | 51.99,48.71 arc-90 TP64.P$1 | TP64.P$1 52.38,49.1 | J7.MOSI 42.79,42.5 41.69,44.03 41.69,47.1 42.89,48.3 R67.2 43.69,48.8 44.59,47.9 51.18,47.9 TP64.P$1
  Bottom 0.305: v54.69,40.7 54.49,40.7 51.99,44.8 51.99,49.2 TP64.P$1
B_12  (via drill 0.35)  (1 unrouted)
  Top 0.305: MCU_B2.6 48.97,35.17 49.39,36.1 49.39,37.5 | 49.39,37.5 49.39,41.07 R66.2 49.79,41.8 48.79,43.3 48.79,43.8 49.29,44.3 51.99,44.3 53.59,41.7 55.09,41.7 57.9,41.7 TP63.P$1 | J7.MISO 47.49,37.73 v47.69,37.5 | v49.69,37.5 49.39,37.5
  Bottom 0.305: v47.69,37.5 v49.69,37.5
B_13  (1 unrouted)
  Top 0.305: 32.29,39.2 TP65.P$1 31.09,39.4 35.44,39.39 35.51,39.39 | 35.51,39.39 37.96,35.2 MCU_B2.3 | R68.2 37.89,39.4 35.84,39.39 35.51,39.39
B_14
  Top 0.305: MCU_B2.2 39.71,35.79 39.09,36.83 JP10.2
B_15
  Top 0.305: 98.62,35.83 98.69,35.83 | 98.69,35.83 MCU_B3.7 100.32,35.83 100.69,36.5 100.69,39.6 98.69,42.5 J8.SCK | R71.2 98.89,28.3 97.69,30.62 97.69,31.4 | 97.69,31.4 R70.1 97.69,34.3 98.69,35.83 | U18.3 103.49,31.4 97.69,31.4
B_16  (via drill 0.35)
  Top 0.305: MCU_B3.5 103.22,34.52 106.61,40.55 v106.69,40.7 | 103.99,48.71 arc-90 TP70.P$1 | TP70.P$1 104.38,49.1 | J8.MOSI 94.79,42.5 93.69,44.03 93.69,47.1 94.89,48.3 R77.2 95.69,48.8 96.59,47.9 103.18,47.9 TP70.P$1
  Bottom 0.305: v106.69,40.7 106.49,40.7 103.99,44.8 103.99,49.2 TP70.P$1
B_17  (via drill 0.35)  (1 unrouted)
  Top 0.305: MCU_B3.6 100.97,35.17 101.39,36.1 101.39,37.5 | 101.39,37.5 101.39,41.07 R76.2 101.79,41.8 100.79,43.3 100.79,43.8 101.29,44.3 103.99,44.3 105.59,41.7 107.09,41.7 109.9,41.7 TP69.P$1 | J8.MISO 99.49,37.73 v99.69,37.5 | v101.69,37.5 101.39,37.5
  Bottom 0.305: v99.69,37.5 v101.69,37.5
B_18  (1 unrouted)
  Top 0.305: 84.29,39.2 TP71.P$1 83.09,39.4 87.44,39.39 87.51,39.39 | 87.51,39.39 89.96,35.2 MCU_B3.3 | R78.2 89.89,39.4 87.84,39.39 87.51,39.39
B_19
  Top 0.305: MCU_B3.2 91.71,35.79 91.09,36.83 JP12.2
B_GND1
  Bottom 1.27: TP33.P$1 91.09,4.9 88.69,7.3 85.69,7.3 85.69,7.1 Q3.C
B_IN1  (1 unrouted)
  Top 0.61: TP34.P$1 87.07,11.3 91.36,11.3 R33.2
B_RESET2  (via drill 0.35)
  Top 0.305: v43.69,35.6 42.79,36.5 41.85,36.5 MCU_B2.1
  Bottom 0.305: v43.69,35.6 50.19,35.6 50.69,36.5 51.89,38.8 50.29,41.6 49.09,41.6 46.69,45 46,45 arc-90 J7.RESET
B_RESET3  (via drill 0.35)
  Top 0.305: v95.69,35.6 94.79,36.5 93.85,36.5 MCU_B3.1
  Bottom 0.305: v95.69,35.6 102.19,35.6 102.69,36.5 103.89,38.8 102.29,41.6 101.09,41.6 98.69,45 98,45 arc-90 J8.RESET
CHARGE_LED2
  Top 0.254: U$13.5V_B 21.79,25.75 21.79,29.45
  Top 0.305: R44.1 18.49,32.4 19.89,32.4 21.79,29.45
CHARGE_LED3
  Top 0.254: U$16.5V_B 73.79,25.75 73.79,29.45
  Top 0.305: R52.1 70.49,32.4 71.89,32.4 73.79,29.45
CHARGE_LED4
  Top 0.254: U$19.5V_B 41.59,74.25 41.59,70.55
  Top 0.305: R63.1 44.89,67.6 43.49,67.6 41.59,70.55
CHARGE_LED5
  Top 0.254: U$22.5V_B 93.59,74.25 93.59,70.55
  Top 0.305: R73.1 96.89,67.6 95.49,67.6 93.59,70.55
GND1
  pour Bottom (isolate 0.305): 113.09,11.3 106.69,0.3 86.69,0.3 80.29,11.3 86.69,22.3 106.69,22.3
  pour Top (isolate 0.305): 106.69,0.3 86.69,0.3 80.29,11.3 86.69,22.3 106.69,22.3 113.09,11.3
  pour Bottom (isolate 0.3): 12.69,9.5 12.69,3.5 8.59,3.5 8.59,9.5
GND2  (via drill 0.35)  (1 unrouted)
  Top 0.254: RED4.- 16.94,40.75
  Top 0.305: 16.94,40.75 R43.1 v18.39,42.5 | U11.2 v10.69,45.5 | MCU_A2.4 22.67,65.47 v22.69,65.7 | JP7.2 arc-90 26.15,54.91 TP52.P$1
  Top 0.813: Z15.1 29.24,63.15 29.29,63.1 CAP_B4.- | U$13.GND U$15.P$1
  Bottom 0.813: 29.02,55.91 TP52.P$1
  other vias: 26.59,46.2 24.99,47.5
  pour Bottom (isolate 0.305): 7.69,75.5 29.69,75.5 37.69,61.5 24.69,39.1 24.69,20.5 12.69,20.5 12.69,39.1 -0.31,61.5
  pour Top (isolate 0.305): 7.69,75.5 29.69,75.5 37.69,61.5 24.69,39.1 24.69,30 12.69,30 12.69,39.1 -0.31,61.5
GND3  (via drill 0.35)  (1 unrouted)
  Top 0.254: RED5.- 68.94,40.75
  Top 0.305: 68.94,40.75 R51.1 v70.39,42.5 | U13.2 v62.69,45.5 | MCU_A3.4 74.67,65.47 v74.69,65.7 | JP8.2 arc-90 78.15,54.91 TP59.P$1
  Top 0.813: Z18.1 81.24,63.15 81.29,63.1 CAP_B5.- | U$16.GND U$18.P$1
  Bottom 0.813: 81.02,55.91 TP59.P$1
  other vias: 78.59,46.2 76.99,47.5
  pour Bottom (isolate 0.305): 59.69,75.5 81.69,75.5 89.69,61.5 76.69,39.1 76.69,20.5 64.69,20.5 64.69,39.1 51.69,61.5
  pour Top (isolate 0.305): 59.69,75.5 81.69,75.5 89.69,61.5 76.69,39.1 76.69,30 64.69,30 64.69,39.1 51.69,61.5
GND4  (via drill 0.35)  (2 unrouted)
  Top 0.254: RED6.- 46.44,59.25
  Top 0.305: 46.44,59.25 R62.1 v44.99,57.5 | U16.2 v52.69,54.5 | MCU_B2.4 40.72,34.52 v40.69,34.3 | JP9.2 arc-90 37.23,45.09 TP66.P$1
  Top 0.813: Z21.1 34.14,36.85 34.09,36.9 31.73,35.65 | U$19.GND U$21.P$1
  Bottom 0.813: 34.36,44.09 TP66.P$1
  other vias: 36.79,53.8 38.59,52.5
  pour Bottom (isolate 0.305): 55.69,24.5 33.69,24.5 25.69,38.5 38.69,60.9 38.69,79.5 50.69,79.5 50.69,60.9 63.69,38.5
  pour Top (isolate 0.305): 55.69,24.5 33.69,24.5 25.69,38.5 38.69,60.9 38.69,70 50.69,70 50.69,60.9 63.69,38.5
GND5  (via drill 0.35)  (2 unrouted)
  Top 0.254: RED7.- 98.44,59.25
  Top 0.305: 98.44,59.25 R72.1 v96.99,57.5 | U19.2 v104.69,54.5 | MCU_B3.4 92.72,34.52 v92.69,34.3 | JP11.2 arc-90 89.23,45.09 TP72.P$1
  Top 0.813: Z24.1 86.14,36.85 86.09,36.9 83.73,35.65 | U$22.GND U$24.P$1
  Bottom 0.813: 86.36,44.09 TP72.P$1
  other vias: 88.79,53.8 90.59,52.5
  pour Bottom (isolate 0.305): 107.69,24.5 85.69,24.5 77.69,38.5 90.69,60.9 90.69,79.5 102.69,79.5 102.69,60.9 115.69,38.5
  pour Top (isolate 0.305): 107.69,24.5 85.69,24.5 77.69,38.5 90.69,60.9 90.69,70 102.69,70 102.69,60.9 115.69,38.5
GND6
  pour Bottom (isolate 0.3): 18.69,9.5 18.69,3.5 14.59,3.5 14.59,9.5
GND7
  pour Bottom (isolate 0.3): 24.69,9.5 24.69,3.5 20.59,3.5 20.59,9.5
GND8
  pour Bottom (isolate 0.3): 30.69,9.5 30.69,3.5 26.59,3.5 26.59,9.5
GND9
  pour Bottom (isolate 0.3): 36.69,9.5 36.69,3.5 32.59,3.5 32.59,9.5
GND10
  pour Bottom (isolate 0.3): 42.69,9.5 42.69,3.5 38.59,3.5 38.59,9.5
GND11
  pour Bottom (isolate 0.3): 48.69,9.5 48.69,3.5 44.59,3.5 44.59,9.5
GND12
  pour Bottom (isolate 0.3): 54.69,9.5 54.69,3.5 50.59,3.5 50.59,9.5
GND13
  pour Bottom (isolate 0.3): 60.69,9.5 60.69,3.5 56.59,3.5 56.59,9.5
GND14
  pour Bottom (isolate 0.3): 66.69,9.5 66.69,3.5 62.59,3.5 62.59,9.5
GND15
  pour Bottom (isolate 0.3): 72.69,9.5 72.69,3.5 68.59,3.5 68.59,9.5
GND16
  pour Bottom (isolate 0.3): 78.69,9.5 78.69,3.5 74.59,3.5 74.59,9.5
N$37  (1 unrouted)
  Top 0.61: Q3.B 87.29,5.03 89.59,8.9 89.89,9.1 R33.1
N$38  (1 unrouted)
  Top 0.61: R34.1 108.69,9.3 Q4.B
N$48
  Top 0.813: R42.1 9.69,3.3 TP48.P$1
N$49
  Top 0.3: R42.2 11.29,5.9
  Top 0.508: 11.29,5.9 D2.+
N$50
  Top 0.813: D2.- 11.69,9.7 TP47.P$1
N$51
  Top 0.305: R44.2 RED4.+
N$52
  Top 0.305: R43.2 14.94,44 Z13.2 15.74,46.2 U11.1
N$53
  Top 0.254: 14.09,40.7 GREEN4.-
  Top 0.305: U11.3 12.99,42.7 14.09,40.7
N$54  (via drill 0.35)  (4 unrouted)
  Top 0.813: CAP_A4.- 10.19,67.6 10.72,67.08 Z14.1 11.59,68.5 v13.69,68.5 | CAP_B4.+ 26.59,67.3 26.67,67.22 Z15.2 25.79,68.5 v23.69,68.5
  Bottom 0.813: v13.69,68.5 v23.69,68.5
N$55
  Top 0.305: R45.2 GREEN4.+
N$56  (2 unrouted)
  Top 0.305: WHITE_13.+ R48.1
N$57
  Top 0.305: WHITE_14.+ 17.69,49.35 R49.1
N$58  (2 unrouted)
  Top 0.305: R50.1 WHITE_15.+
N$59  (via drill 0.35)  (2 unrouted)
  Top 0.305: WHITE_14.- v21.19,49.2 | WHITE_15.- 27.19,58.12 v27.19,58.1 | JP7.1 arc-90 24.69,54.57 v24.69,55.8 | WHITE_13.- 12.19,56.5 v13.69,56.5 13.79,56.5
  Bottom 0.305: 25.85,55.82 21.89,49.2 v21.19,49.2 17.79,49.2 13.69,55.9 v13.69,56.5 | 25.85,55.82 v27.19,58.1 | v24.69,55.8 arc-90 24.91,55.82 25.85,55.82
N$60
  Top 0.305: R52.2 RED5.+
N$61
  Top 0.305: R51.2 66.94,44 Z16.2 67.74,46.2 U13.1
N$62
  Top 0.254: 66.09,40.7 GREEN5.-
  Top 0.305: U13.3 64.99,42.7 66.09,40.7
N$63  (via drill 0.35)  (4 unrouted)
  Top 0.813: CAP_A5.- 62.19,67.6 62.72,67.08 Z17.1 63.59,68.5 v65.69,68.5 | CAP_B5.+ 78.59,67.3 78.67,67.22 Z18.2 77.79,68.5 v75.69,68.5
  Bottom 0.813: v65.69,68.5 v75.69,68.5
N$64
  Top 0.305: R53.2 GREEN5.+
N$65  (2 unrouted)
  Top 0.305: WHITE_16.+ R56.1
N$66
  Top 0.305: WHITE_17.+ 69.69,49.35 R57.1
N$67  (2 unrouted)
  Top 0.305: R58.1 WHITE_18.+
N$68  (via drill 0.35)  (2 unrouted)
  Top 0.305: WHITE_17.- v73.19,49.2 | WHITE_18.- 79.19,58.12 v79.19,58.1 | JP8.1 arc-90 76.69,54.57 v76.69,55.8 | WHITE_16.- 64.19,56.5 v65.69,56.5 65.79,56.5
  Bottom 0.305: 77.85,55.82 73.89,49.2 v73.19,49.2 69.79,49.2 65.69,55.9 v65.69,56.5 | 77.85,55.82 v79.19,58.1 | v76.69,55.8 arc-90 76.91,55.82 77.85,55.82
N$69
  Top 0.305: R59.1 C3.2 43.49,28.3 MIC2.+
N$70  (via drill 0.35)
  Top 0.305: C3.1 v42.39,30.3 | v46.99,30.3 R61.1 arc90 48.44,30.25 U15.1
  Bottom 0.305: v42.39,30.3 v46.99,30.3
N$71
  Top 0.305: R63.2 RED6.+
N$72
  Top 0.305: R62.2 48.44,56 Z19.2 47.64,53.8 U16.1
N$73
  Top 0.254: 49.29,59.3 GREEN6.-
  Top 0.305: U16.3 50.39,57.3 49.29,59.3
N$74  (via drill 0.35)  (5 unrouted)
  Top 0.813: 52.67,32.92 53.19,32.4 55.13,31.25 | 34.27,31.25 36.79,32.7 36.72,32.77 Z21.2 37.17,32.5 v39.69,32.5 | 51.79,32.5 v49.69,32.5 | Z20.1 52.67,32.92 | 52.67,32.92 arc-90 52.67,32.92
  Bottom 0.813: v49.69,32.5 v39.69,32.5
N$75
  Top 0.305: R64.2 GREEN6.+
N$76  (2 unrouted)
  Top 0.305: WHITE_19.+ R66.1
N$77
  Top 0.305: WHITE_20.+ 45.69,50.65 R67.1
N$78  (2 unrouted)
  Top 0.305: R68.1 WHITE_21.+
N$79  (via drill 0.35)  (2 unrouted)
  Top 0.305: WHITE_20.- v42.19,50.8 | WHITE_21.- 36.19,41.88 v36.19,41.9 | JP9.1 arc-90 38.69,45.43 v38.69,44.2 | WHITE_19.- 51.19,43.5 v49.69,43.5 49.59,43.5
  Bottom 0.305: 37.53,44.18 41.49,50.8 v42.19,50.8 45.59,50.8 49.69,44.1 v49.69,43.5 | 37.53,44.18 v36.19,41.9 | v38.69,44.2 arc-90 38.47,44.18 37.53,44.18
N$80
  Top 0.305: R69.1 C4.2 95.49,28.3 MIC3.+
N$81  (via drill 0.35)
  Top 0.305: C4.1 v94.39,30.3 | v98.99,30.3 R71.1 arc90 100.44,30.25 U18.1
  Bottom 0.305: v94.39,30.3 v98.99,30.3
N$82
  Top 0.305: R73.2 RED7.+
N$83
  Top 0.305: R72.2 100.44,56 Z22.2 99.64,53.8 U19.1
N$84
  Top 0.254: 101.29,59.3 GREEN7.-
  Top 0.305: U19.3 102.39,57.3 101.29,59.3
N$85  (via drill 0.35)  (5 unrouted)
  Top 0.813: 104.67,32.92 105.19,32.4 107.13,31.25 | 86.27,31.25 88.79,32.7 88.72,32.77 Z24.2 89.17,32.5 v91.69,32.5 | 103.79,32.5 v101.69,32.5 | Z23.1 104.67,32.92 | 104.67,32.92 arc-90 104.67,32.92
  Bottom 0.813: v101.69,32.5 v91.69,32.5
N$86
  Top 0.305: R74.2 GREEN7.+
N$87  (2 unrouted)
  Top 0.305: WHITE_22.+ R76.1
N$88
  Top 0.305: WHITE_23.+ 97.69,50.65 R77.1
N$89  (2 unrouted)
  Top 0.305: R78.1 WHITE_24.+
N$90  (via drill 0.35)  (2 unrouted)
  Top 0.305: WHITE_23.- v94.19,50.8 | WHITE_24.- 88.19,41.88 v88.19,41.9 | JP11.1 arc-90 90.69,45.43 v90.69,44.2 | WHITE_22.- 103.19,43.5 v101.69,43.5 101.59,43.5
  Bottom 0.305: 89.53,44.18 93.49,50.8 v94.19,50.8 97.59,50.8 101.69,44.1 v101.69,43.5 | 89.53,44.18 v88.19,41.9 | v90.69,44.2 arc-90 90.47,44.18 89.53,44.18
N$91
  Top 0.813: R79.1 15.69,3.3 TP76.P$1
N$92
  Top 0.3: R79.2 17.29,5.9
  Top 0.508: 17.29,5.9 D3.+
N$93
  Top 0.813: D3.- 17.69,9.7 TP75.P$1
N$94
  Top 0.813: R80.1 21.69,3.3 TP78.P$1
N$95
  Top 0.3: R80.2 23.29,5.9
  Top 0.508: 23.29,5.9 D4.+
N$96
  Top 0.813: D4.- 23.69,9.7 TP77.P$1
N$97
  Top 0.813: R81.1 27.69,3.3 TP80.P$1
N$98
  Top 0.3: R81.2 29.29,5.9
  Top 0.508: 29.29,5.9 D5.+
N$99
  Top 0.813: D5.- 29.69,9.7 TP79.P$1
N$100
  Top 0.813: R82.1 33.69,3.3 TP82.P$1
N$101
  Top 0.3: R82.2 35.29,5.9
  Top 0.508: 35.29,5.9 D6.+
N$102
  Top 0.813: D6.- 35.69,9.7 TP81.P$1
N$103
  Top 0.813: R83.1 39.69,3.3 TP84.P$1
N$104
  Top 0.3: R83.2 41.29,5.9
  Top 0.508: 41.29,5.9 D7.+
N$105
  Top 0.813: D7.- 41.69,9.7 TP83.P$1
N$106
  Top 0.813: R84.1 45.69,3.3 TP86.P$1
N$107
  Top 0.3: R84.2 47.29,5.9
  Top 0.508: 47.29,5.9 D8.+
N$108
  Top 0.813: D8.- 47.69,9.7 TP85.P$1
N$109
  Top 0.813: R85.1 51.69,3.3 TP88.P$1
N$110
  Top 0.3: R85.2 53.29,5.9
  Top 0.508: 53.29,5.9 D9.+
N$111
  Top 0.813: D9.- 53.69,9.7 TP87.P$1
N$112
  Top 0.813: R86.1 57.69,3.3 TP90.P$1
N$113
  Top 0.3: R86.2 59.29,5.9
  Top 0.508: 59.29,5.9 D10.+
N$114
  Top 0.813: D10.- 59.69,9.7 TP89.P$1
N$115
  Top 0.813: R87.1 63.69,3.3 TP92.P$1
N$116
  Top 0.3: R87.2 65.29,5.9
  Top 0.508: 65.29,5.9 D11.+
N$117
  Top 0.813: D11.- 65.69,9.7 TP91.P$1
N$118
  Top 0.813: R88.1 69.69,3.3 TP94.P$1
N$119
  Top 0.3: R88.2 71.29,5.9
  Top 0.508: 71.29,5.9 D12.+
N$120
  Top 0.813: D12.- 71.69,9.7 TP93.P$1
N$121
  Top 0.813: R89.1 75.69,3.3 TP96.P$1
N$122
  Top 0.3: R89.2 77.29,5.9
  Top 0.508: 77.29,5.9 D13.+
N$123
  Top 0.813: D13.- 77.69,9.7 TP95.P$1
S$8  (1 unrouted)
  Top 1.27: TP38.P$1 89.02,19 TP40.P$1 92.69,17.8
  Bottom 1.27: TP38.P$1 89.02,19 TP40.P$1 94.59,18.3 | 104.49,17.93 TP39.P$1 105.29,17.8 98.79,11.3 | Q4.E 99.92,11.3 98.79,11.3 | 93.69,19.3 92.69,18.3 92.69,11.3 | 98.79,11.3 92.69,11.3 | 92.69,11.3 90.69,9.3 84.42,9.3 Q3.E
V_POWER1
  Top 1.27: TP37.P$1 99.59,18.9 99.59,14.11 96.69,9.07 TP36.P$1
VCAP4  (via drill 0.35)  (3 unrouted)
  Top 0.305: R46.2 21.19,45.25
  Top 0.813: 21.19,45.25 Z13.1 | Z14.2 7.64,63.15 arc-90 7.59,63.2 CAP_A4.+ | R46.2 23.99,41.3 v24.69,42.5 24.69,43.7 U12.3
  Bottom 0.813: CAP_A4.+ 8.27,62.72 20.49,42.5 v24.69,42.5
VCAP5  (via drill 0.35)  (3 unrouted)
  Top 0.305: R54.2 73.19,45.25
  Top 0.813: 73.19,45.25 Z16.1 | Z17.2 59.64,63.15 arc-90 59.59,63.2 CAP_A5.+ | R54.2 75.99,41.3 v76.69,42.5 76.69,43.7 U14.3
  Bottom 0.813: CAP_A5.+ 60.27,62.72 72.49,42.5 v76.69,42.5
VCAP6  (via drill 0.35)  (3 unrouted)
  Top 0.305: R65.2 42.19,54.75
  Top 0.813: 42.19,54.75 Z19.1 | Z20.2 55.74,36.85 | 55.74,36.85 arc-90 55.79,36.8 | R65.2 39.39,58.7 v38.69,57.5 38.69,56.3 U17.3 | CAP_A6.+ 55.74,36.85
  Bottom 0.813: 57.67,35.65 55.11,37.28 42.89,57.5 v38.69,57.5
VCAP7  (via drill 0.35)  (3 unrouted)
  Top 0.305: R75.2 94.19,54.75
  Top 0.813: 94.19,54.75 Z22.1 | Z23.2 107.74,36.85 | 107.74,36.85 arc-90 107.79,36.8 | R75.2 91.39,58.7 v90.69,57.5 90.69,56.3 U20.3 | CAP_A7.+ 107.74,36.85
  Bottom 0.813: 109.67,35.65 107.11,37.28 94.89,57.5 v90.69,57.5
VCC2  (via drill 0.35)
  Top 0.305: R45.1 v14.69,33.4 | v14.69,47.5 22.69,47.5 22.69,46.5 | 25.69,49.9 26.67,49.95 TP54.P$1 | MCU_A2.8 15.9,63.5 17.49,63.5 19.96,60.23 J5.VCC
  Top 0.61: U12.2 22.69,46.5 22.69,50.5 | J5.VCC 20.45,60.04 20.49,60 22.69,57.01 22.69,50.5 | 22.69,50.5 26.12,50.5 26.67,49.95
  Bottom 0.305: v14.69,33.4 v14.69,47.5
VCC3  (via drill 0.35)
  Top 0.305: R53.1 v66.69,33.4 | v66.69,47.5 74.69,47.5 74.69,46.5 | 77.69,49.9 78.67,49.95 TP61.P$1 | MCU_A3.8 67.9,63.5 69.49,63.5 71.96,60.23 J6.VCC
  Top 0.61: U14.2 74.69,46.5 74.69,50.5 | J6.VCC 72.45,60.04 72.49,60 74.69,57.01 74.69,50.5 | 74.69,50.5 78.12,50.5 78.67,49.95
  Bottom 0.305: v66.69,33.4 v66.69,47.5
VCC4  (via drill 0.35)
  Top 0.305: R64.1 v48.69,66.6 | v48.69,52.5 40.69,52.5 40.69,53.5 | 37.69,50.1 36.71,50.05 TP68.P$1 | MCU_B2.8 47.48,36.5 46.69,36.5 45.89,36.5 | 45.89,36.5 45.82,36.6 | 45.82,36.6 | 45.82,36.6 43.42,39.77 J7.VCC 41.62,37.4 JP10.3 | 45.89,36.5 43.69,33.3 R60.2 42.89,31.3 39.39,31.3 R59.2
  Top 0.61: U17.2 40.69,53.5 40.69,49.5 | J7.VCC 42.93,39.96 42.89,40 40.69,42.99 40.69,49.5 | 40.69,49.5 37.26,49.5 36.71,50.05
  Bottom 0.305: v48.69,66.6 v48.69,52.5
VCC5  (via drill 0.35)
  Top 0.305: R74.1 v100.69,66.6 | v100.69,52.5 92.69,52.5 92.69,53.5 | 89.69,50.1 88.71,50.05 TP74.P$1 | MCU_B3.8 99.48,36.5 98.69,36.5 97.89,36.5 | 97.89,36.5 97.82,36.6 | 97.82,36.6 | 97.82,36.6 95.42,39.77 J8.VCC 93.62,37.4 JP12.3 | 97.89,36.5 95.69,33.3 R70.2 94.89,31.3 91.39,31.3 R69.2
  Top 0.61: U20.2 92.69,53.5 92.69,49.5 | J8.VCC 94.93,39.96 94.89,40 92.69,42.99 92.69,49.5 | 92.69,49.5 89.26,49.5 88.71,50.05
  Bottom 0.305: v100.69,66.6 v100.69,52.5
VCHARGE2
  Top 0.813: U$13.5V_A 22.94,31.05 U$14.P$1 21.19,32.8 R46.1
VCHARGE3
  Top 0.813: U$16.5V_A 74.94,31.05 U$17.P$1 73.19,32.8 R54.1
VCHARGE4  (1 unrouted)
  Top 0.813: U$19.5V_A 40.44,68.95 40.99,68.4 42.19,67.2 R65.1
VCHARGE5  (1 unrouted)
  Top 0.813: U$22.5V_A 92.44,68.95 92.99,68.4 94.19,67.2 R75.1

## Text on the board
tPlace: VIN_5V | GND | VIN_5V | GND | TOUCH / A1 | TOUCH / A1 | 4/A2 | 4/A2 | 1 | 1 | GND | GND | GND | LEDS | GND | LEDS | 0 | 0 | 3V3 | 3V3 | 3V3 | 3V3 | 0 | 0 | LEDS | GND | LEDS | GND | GND | GND | - | + | 1 | - | + | 1 | 4/A2 | 4/A2 | 3 | 3 | MIC / A1 | MIC / A1 | GND | VIN_5V | GND | VIN_5V | GND | V- | V+ | GND | POWER | IN B | IN A | OUT | B- | V+ | A-